# EAGLE board Panelized (EAGLE 9.2.2)
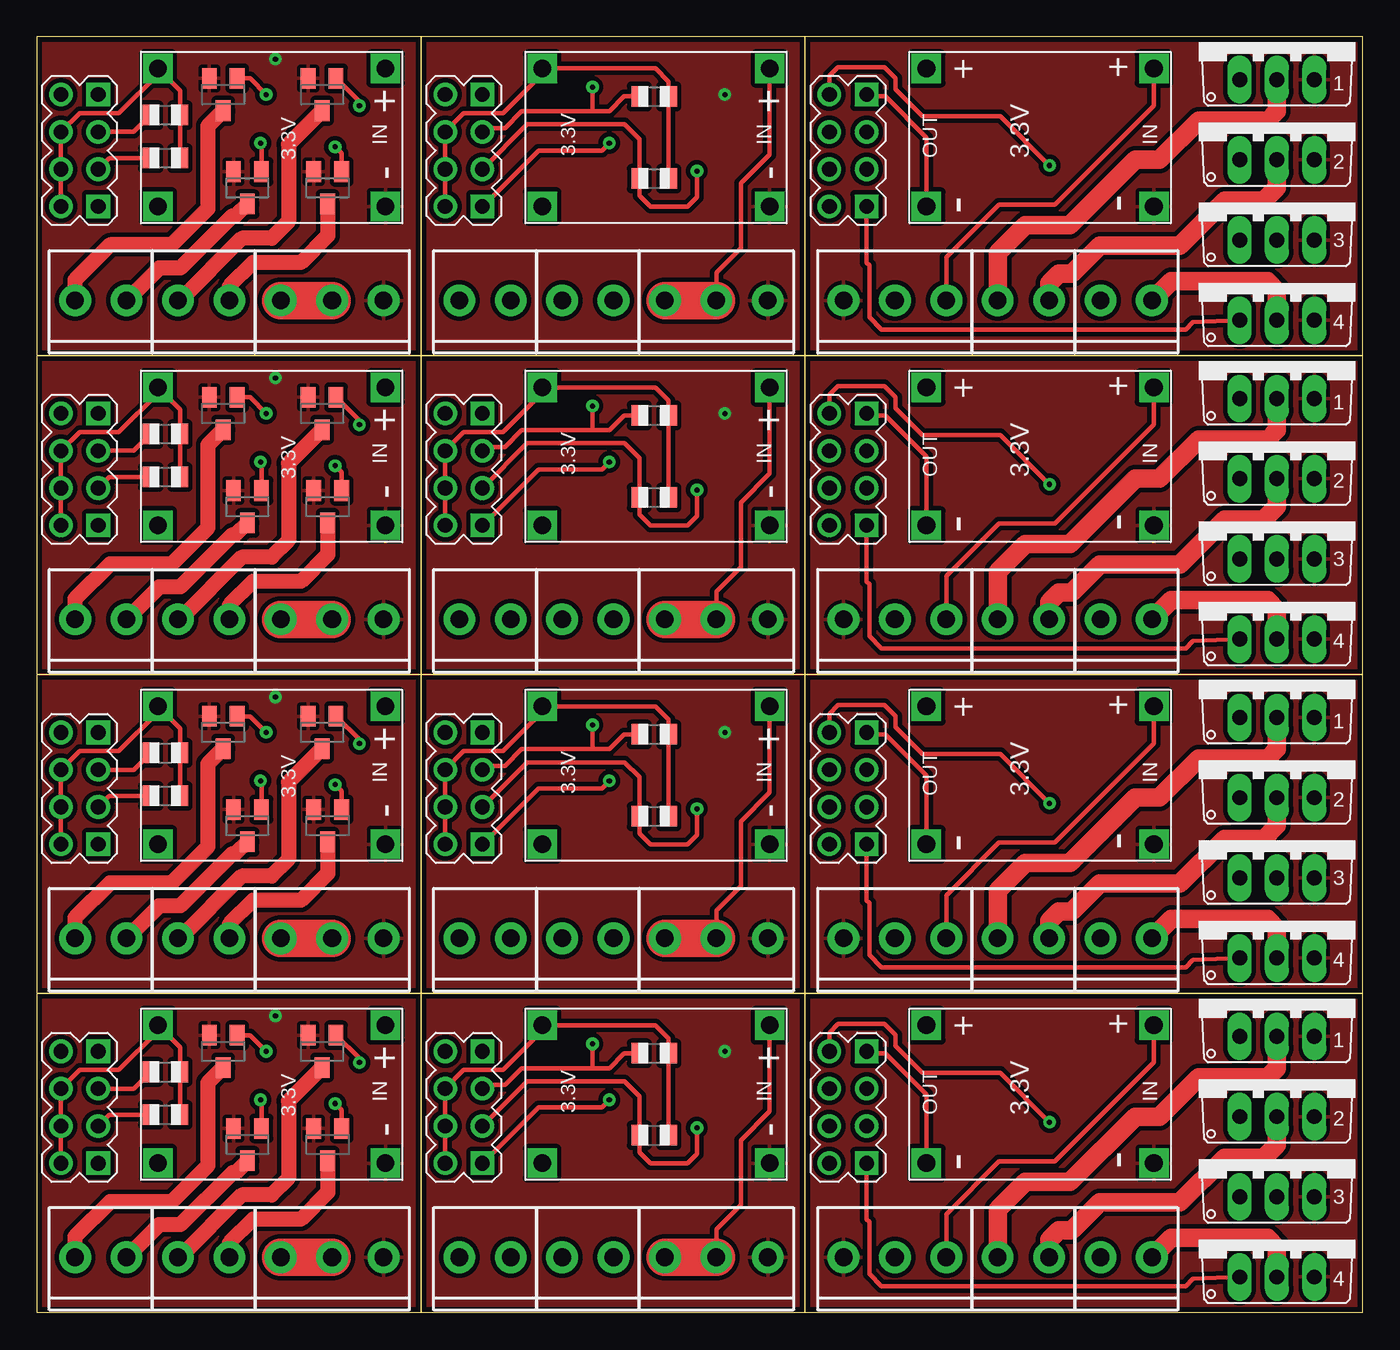
[diagram p0: board, top side]
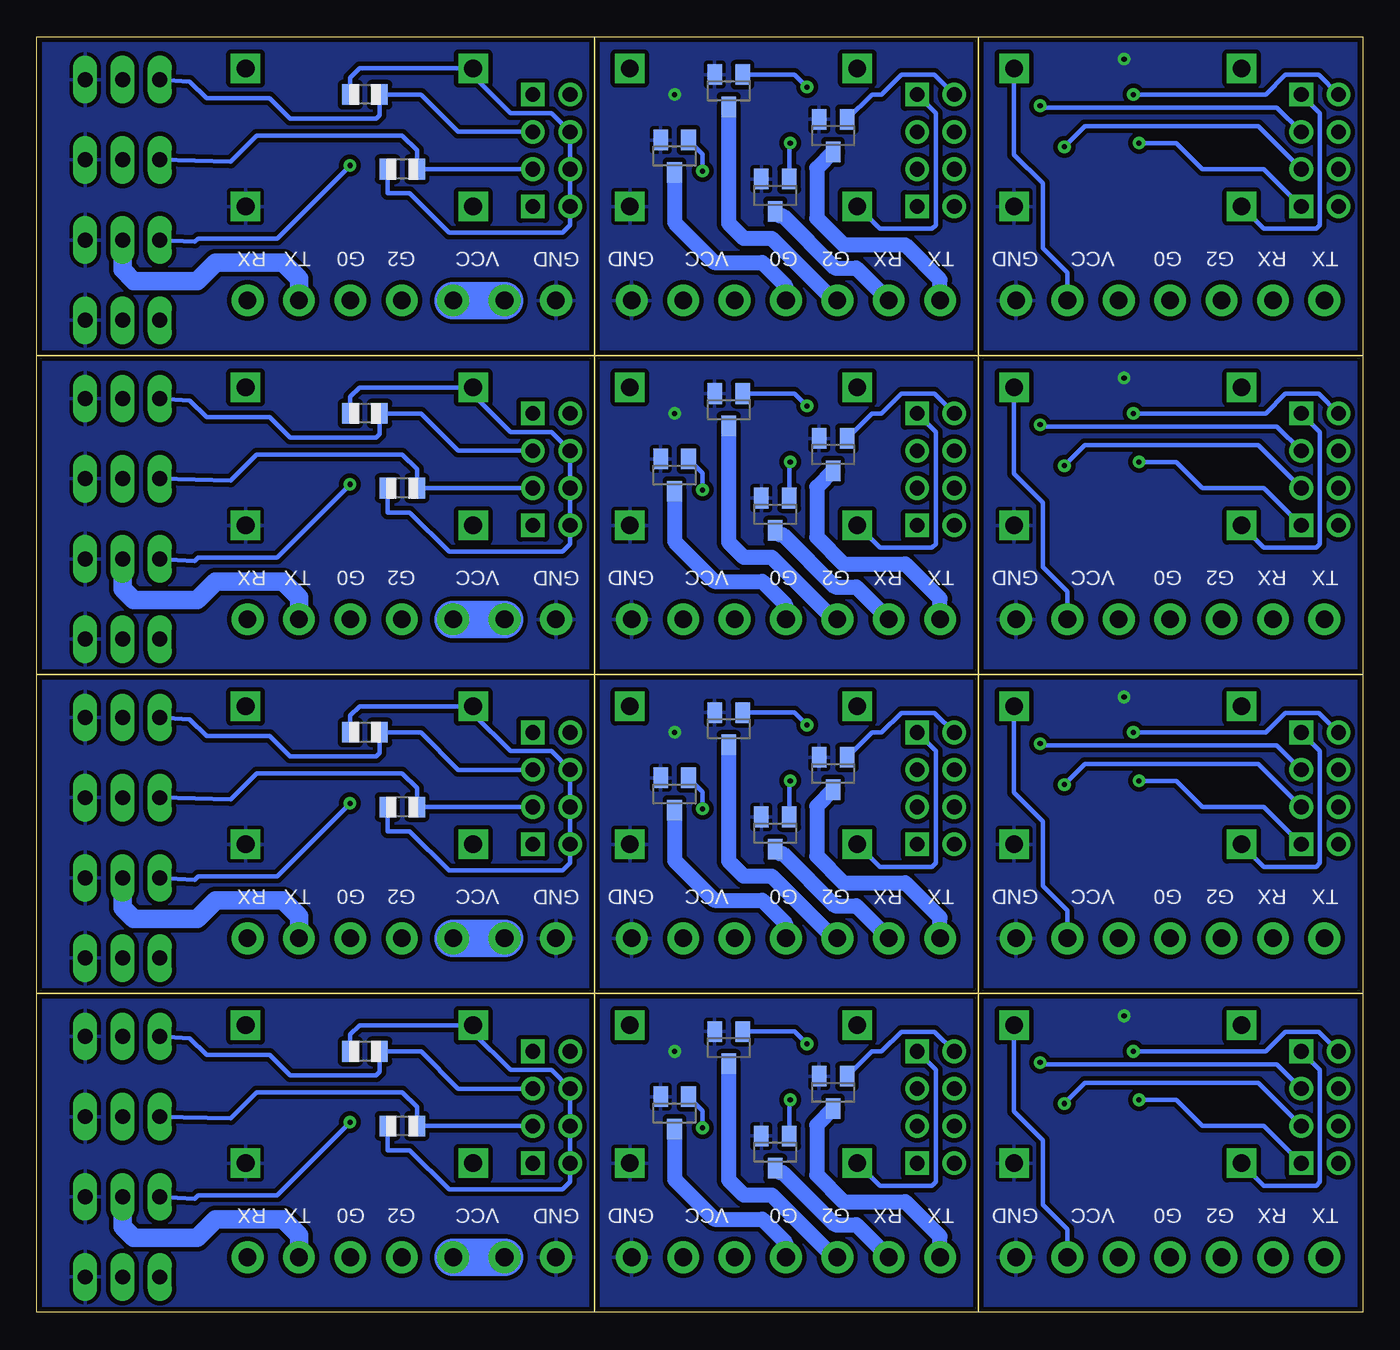
[diagram p1: board, bottom side, seen from below]

Size 90.3 x 86.87 mm. Coordinates in mm from the lower left corner, seen from the top.
Outline: 0,0 26.16,0.01 26.16,21.72 0,21.71 0,0
Outline: 26.16,0 52.32,0.01 52.32,21.72 26.16,21.71 26.16,0
Outline: 52.32,0 90.3,0.01 90.3,21.72 52.32,21.71 52.32,0
Outline: 0,21.72 26.16,21.72 26.16,43.44 0,43.43 0,21.72
Outline: 26.16,21.72 52.32,21.72 52.32,43.44 26.16,43.43 26.16,21.72
Outline: 52.32,21.72 90.3,21.72 90.3,43.44 52.32,43.43 52.32,21.72
Outline: 0,43.43 26.16,43.44 26.16,65.15 0,65.15 0,43.43
Outline: 26.16,43.43 52.32,43.44 52.32,65.15 26.16,65.15 26.16,43.43
Outline: 52.32,43.43 90.3,43.44 90.3,65.15 52.32,65.15 52.32,43.43
Outline: 0,65.15 26.16,65.16 26.16,86.87 0,86.86 0,65.15
Outline: 26.16,65.15 52.32,65.16 52.32,86.87 26.16,86.86 26.16,65.15
Outline: 52.32,65.15 90.3,65.16 90.3,86.87 52.32,86.86 52.32,65.15
Copper layers (1*16): Top 0.035mm / dielectric 1.5mm / Bottom 0.035mm
Design rules "default *": minimum track width 6mil, minimum drill 0.35mm, track to track 12mil, track to pad 12mil, pad to pad 12mil, via to via 12mil, smd to smd 12mil, copper to edge 14mil, drill to drill 6mil, minimum pad ring 12mil, minimum via ring 10mil, stop-mask expansion 4mil, vias tented up to drill 15mil, thermal gap 10mil

## Footprints (pad centres in the part's own frame; a part is rotated, then mirrored left to right if it is on the bottom)
SCREWTERMINAL-3.5MM-2 = drill 1.2 pad 2.159: 1 0,0; 2 3.5,0
SCREWTERMINAL-3.5MM-3 = drill 1.2 pad 2.159: 1 0,0; 2 3.5,0; 3 7,0
SOT23 = smd 1 x 1.4: 1 -0.95,-1.1; 2 0.95,-1.1; 3 0,1.1
TO220V = drill 1.016 long: 1 -2.54,-2.54; 2 0,-2.54; 3 2.54,-2.54
R0805 = smd 1.1 x 1.4: 1 -1,0; 2 1,0
DC-DC-STEP-DOWN-MP2307 = drill 1.2 pad 2 square: IN+ -7.747,-4.699; IN- -7.747,4.699; OUT+ 7.747,-4.699; OUT- 7.747,4.699
WIRELESS-WIFI-ESP-01 = drill 1 square: A1 -8.89,3.81; D1 -8.89,-3.81 | drill 1: A2 -11.43,3.81; B1 -8.89,1.27; B2 -11.43,1.27; C1 -8.89,-1.27; C2 -11.43,-1.27; D2 -11.43,-3.81

## Placement (x,y rotation side)
J1  [SCREWTERMINAL-3.5MM-2]  9.62,3.76 0 top
J2  [SCREWTERMINAL-3.5MM-2]  2.62,3.76 0 top
J3  [SCREWTERMINAL-3.5MM-3]  16.62,3.76 0 top
J4  [SCREWTERMINAL-3.5MM-2]  35.78,3.76 0 top
J5  [SCREWTERMINAL-3.5MM-2]  28.78,3.76 0 top
J6  [SCREWTERMINAL-3.5MM-3]  42.78,3.76 0 top
J7  [SCREWTERMINAL-3.5MM-2]  65.44,3.76 0 top
J8  [SCREWTERMINAL-3.5MM-2]  72.44,3.76 0 top
J9  [SCREWTERMINAL-3.5MM-3]  54.94,3.76 0 top
J10  [SCREWTERMINAL-3.5MM-2]  9.62,25.48 0 top
J11  [SCREWTERMINAL-3.5MM-2]  2.62,25.48 0 top
J12  [SCREWTERMINAL-3.5MM-3]  16.62,25.48 0 top
J13  [SCREWTERMINAL-3.5MM-2]  35.78,25.48 0 top
J14  [SCREWTERMINAL-3.5MM-2]  28.78,25.48 0 top
J15  [SCREWTERMINAL-3.5MM-3]  42.78,25.48 0 top
J16  [SCREWTERMINAL-3.5MM-2]  65.44,25.48 0 top
J17  [SCREWTERMINAL-3.5MM-2]  72.44,25.48 0 top
J18  [SCREWTERMINAL-3.5MM-3]  54.94,25.48 0 top
J19  [SCREWTERMINAL-3.5MM-2]  9.62,47.19 0 top
J20  [SCREWTERMINAL-3.5MM-2]  2.62,47.19 0 top
J21  [SCREWTERMINAL-3.5MM-3]  16.62,47.19 0 top
J22  [SCREWTERMINAL-3.5MM-2]  35.78,47.19 0 top
J23  [SCREWTERMINAL-3.5MM-2]  28.78,47.19 0 top
J24  [SCREWTERMINAL-3.5MM-3]  42.78,47.19 0 top
J25  [SCREWTERMINAL-3.5MM-2]  65.44,47.19 0 top
J26  [SCREWTERMINAL-3.5MM-2]  72.44,47.19 0 top
J27  [SCREWTERMINAL-3.5MM-3]  54.94,47.19 0 top
J28  [SCREWTERMINAL-3.5MM-2]  9.62,68.91 0 top
J29  [SCREWTERMINAL-3.5MM-2]  2.62,68.91 0 top
J30  [SCREWTERMINAL-3.5MM-3]  16.62,68.91 0 top
J31  [SCREWTERMINAL-3.5MM-2]  35.78,68.91 0 top
J32  [SCREWTERMINAL-3.5MM-2]  28.78,68.91 0 top
J33  [SCREWTERMINAL-3.5MM-3]  42.78,68.91 0 top
J34  [SCREWTERMINAL-3.5MM-2]  65.44,68.91 0 top
J35  [SCREWTERMINAL-3.5MM-2]  72.44,68.91 0 top
J36  [SCREWTERMINAL-3.5MM-3]  54.94,68.91 0 top
Q1  [SOT23]  12.7,17.78 180 top
Q2  [SOT23]  14.35,11.43 180 top
Q3  [SOT23]  19.81,11.43 180 top
Q4  [SOT23]  19.43,17.78 180 top
Q5  [SOT23]  36.07,14.99 180 bottom
Q6  [SOT23]  40.01,10.92 180 bottom
Q7  [SOT23]  46.86,13.59 180 bottom
Q8  [SOT23]  43.18,18.03 180 bottom
Q9  [TO220V]  84.45,10.41 0 top
Q10  [TO220V]  84.45,4.95 0 top
Q11  [TO220V]  84.45,15.88 0 top
Q12  [TO220V]  84.45,21.34 0 top
Q13  [SOT23]  12.7,39.5 180 top
Q14  [SOT23]  14.35,33.15 180 top
Q15  [SOT23]  19.81,33.15 180 top
Q16  [SOT23]  19.43,39.5 180 top
Q17  [SOT23]  36.07,36.7 180 bottom
Q18  [SOT23]  40.01,32.64 180 bottom
Q19  [SOT23]  46.86,35.31 180 bottom
Q20  [SOT23]  43.18,39.75 180 bottom
Q21  [TO220V]  84.45,32.13 0 top
Q22  [TO220V]  84.45,26.67 0 top
Q23  [TO220V]  84.45,37.59 0 top
Q24  [TO220V]  84.45,43.05 0 top
Q25  [SOT23]  12.7,61.21 180 top
Q26  [SOT23]  14.35,54.86 180 top
Q27  [SOT23]  19.81,54.86 180 top
Q28  [SOT23]  19.43,61.21 180 top
Q29  [SOT23]  36.07,58.42 180 bottom
Q30  [SOT23]  40.01,54.36 180 bottom
Q31  [SOT23]  46.86,57.02 180 bottom
Q32  [SOT23]  43.18,61.47 180 bottom
Q33  [TO220V]  84.45,53.85 0 top
Q34  [TO220V]  84.45,48.39 0 top
Q35  [TO220V]  84.45,59.31 0 top
Q36  [TO220V]  84.45,64.77 0 top
Q37  [SOT23]  12.7,82.93 180 top
Q38  [SOT23]  14.35,76.58 180 top
Q39  [SOT23]  19.81,76.58 180 top
Q40  [SOT23]  19.43,82.93 180 top
Q41  [SOT23]  36.07,80.14 180 bottom
Q42  [SOT23]  40.01,76.07 180 bottom
Q43  [SOT23]  46.86,78.74 180 bottom
Q44  [SOT23]  43.18,83.19 180 bottom
Q45  [TO220V]  84.45,75.56 0 top
Q46  [TO220V]  84.45,70.1 0 top
Q47  [TO220V]  84.45,81.03 0 top
Q48  [TO220V]  84.45,86.49 0 top
R1  [R0805]  8.76,13.46 0 top
R2  [R0805]  8.76,16.38 0 top
R3  [R0805]  42.04,12.06 0 top
R4  [R0805]  42.04,17.65 0 top
R5  [R0805]  65.41,12.7 180 bottom
R6  [R0805]  67.94,17.78 180 bottom
R7  [R0805]  8.76,35.18 0 top
R8  [R0805]  8.76,38.1 0 top
R9  [R0805]  42.04,33.78 0 top
R10  [R0805]  42.04,39.37 0 top
R11  [R0805]  65.41,34.42 180 bottom
R12  [R0805]  67.94,39.5 180 bottom
R13  [R0805]  8.76,56.9 0 top
R14  [R0805]  8.76,59.82 0 top
R15  [R0805]  42.04,55.5 0 top
R16  [R0805]  42.04,61.09 0 top
R17  [R0805]  65.41,56.13 180 bottom
R18  [R0805]  67.94,61.21 180 bottom
R19  [R0805]  8.76,78.61 0 top
R20  [R0805]  8.76,81.53 0 top
R21  [R0805]  42.04,77.22 0 top
R22  [R0805]  42.04,82.8 0 top
R23  [R0805]  65.41,77.85 180 bottom
R24  [R0805]  67.94,82.93 180 bottom
U$1  DC-DC-STEP-DOWN-MP2307  [DC-DC-STEP-DOWN-MP2307]  16,14.86 180 top
U$2  WIRELESS-WIFI-ESP-01  [WIRELESS-WIFI-ESP-01]  13.08,13.97 0 top
U$3  DC-DC-STEP-DOWN-MP2307  [DC-DC-STEP-DOWN-MP2307]  42.16,14.86 180 top
U$4  WIRELESS-WIFI-ESP-01  [WIRELESS-WIFI-ESP-01]  39.24,13.97 0 top
U$5  DC-DC-STEP-DOWN-MP2307  [DC-DC-STEP-DOWN-MP2307]  68.33,14.86 180 top
U$6  WIRELESS-WIFI-ESP-01  [WIRELESS-WIFI-ESP-01]  65.41,13.97 0 top
U$7  DC-DC-STEP-DOWN-MP2307  [DC-DC-STEP-DOWN-MP2307]  16,36.58 180 top
U$8  WIRELESS-WIFI-ESP-01  [WIRELESS-WIFI-ESP-01]  13.08,35.69 0 top
U$9  DC-DC-STEP-DOWN-MP2307  [DC-DC-STEP-DOWN-MP2307]  42.16,36.58 180 top
U$10  WIRELESS-WIFI-ESP-01  [WIRELESS-WIFI-ESP-01]  39.24,35.69 0 top
U$11  DC-DC-STEP-DOWN-MP2307  [DC-DC-STEP-DOWN-MP2307]  68.33,36.58 180 top
U$12  WIRELESS-WIFI-ESP-01  [WIRELESS-WIFI-ESP-01]  65.41,35.69 0 top
U$13  DC-DC-STEP-DOWN-MP2307  [DC-DC-STEP-DOWN-MP2307]  16,58.29 180 top
U$14  WIRELESS-WIFI-ESP-01  [WIRELESS-WIFI-ESP-01]  13.08,57.4 0 top
U$15  DC-DC-STEP-DOWN-MP2307  [DC-DC-STEP-DOWN-MP2307]  42.16,58.29 180 top
U$16  WIRELESS-WIFI-ESP-01  [WIRELESS-WIFI-ESP-01]  39.24,57.4 0 top
U$17  DC-DC-STEP-DOWN-MP2307  [DC-DC-STEP-DOWN-MP2307]  68.33,58.29 180 top
U$18  WIRELESS-WIFI-ESP-01  [WIRELESS-WIFI-ESP-01]  65.41,57.4 0 top
U$19  DC-DC-STEP-DOWN-MP2307  [DC-DC-STEP-DOWN-MP2307]  16,80.01 180 top
U$20  WIRELESS-WIFI-ESP-01  [WIRELESS-WIFI-ESP-01]  13.08,79.12 0 top
U$21  DC-DC-STEP-DOWN-MP2307  [DC-DC-STEP-DOWN-MP2307]  42.16,80.01 180 top
U$22  WIRELESS-WIFI-ESP-01  [WIRELESS-WIFI-ESP-01]  39.24,79.12 0 top
U$23  DC-DC-STEP-DOWN-MP2307  [DC-DC-STEP-DOWN-MP2307]  68.33,80.01 180 top
U$24  WIRELESS-WIFI-ESP-01  [WIRELESS-WIFI-ESP-01]  65.41,79.12 0 top

## Library data of the parts
J1 J2 J4 J5 J7 J8 J10 J11 J13 J14 J16 J17 J19 J20 J22 J23 J25 J26 J28 J29 J31 J32 J34 J35 = custom; PROD_ID: CONN-08399
J3 J6 J9 J12 J15 J18 J21 J24 J27 J30 J33 J36 = custom; PROD_ID: CONN-08288; SF_ID: PRT-08235
Q1-Q48 R1-R24 = adafruit
U$1 U$3 U$5 U$7 U$9 U$11 U$13 U$15 U$17 U$19 U$21 U$23 = custom; OC_FARNELL: unknown
U$2 U$4 U$6 U$8 U$10 U$12 U$14 U$16 U$18 U$20 U$22 U$24 = custom; OC_FARNELL: unknown; SPICEPREFIX: X

## Nets
GND: J3.3 Q1.2 Q2.2 Q3.2 Q4.2 U$1.IN-
GND1: J6.3 Q5.2 Q6.2 Q7.2 Q8.2 U$3.IN-
GND2: J9.1 Q9.3 Q10.3 Q11.3 Q12.3 U$5.IN-
GND3: J12.3 Q13.2 Q14.2 Q15.2 Q16.2 U$7.IN-
GND4: J15.3 Q17.2 Q18.2 Q19.2 Q20.2 U$9.IN-
GND5: J18.1 Q21.3 Q22.3 Q23.3 Q24.3 U$11.IN-
GND6: J21.3 Q25.2 Q26.2 Q27.2 Q28.2 U$13.IN-
GND7: J24.3 Q29.2 Q30.2 Q31.2 Q32.2 U$15.IN-
GND8: J27.1 Q33.3 Q34.3 Q35.3 Q36.3 U$17.IN-
GND9: J30.3 Q37.2 Q38.2 Q39.2 Q40.2 U$19.IN-
GND10: J33.3 Q41.2 Q42.2 Q43.2 Q44.2 U$21.IN-
GND11: J36.1 Q45.3 Q46.3 Q47.3 Q48.3 U$23.IN-
N$1: R1.2 R2.2 U$1.OUT+ U$2.B2 U$2.C2 U$2.D2
N$2: Q2.1 U$2.D1
N$3: U$1.OUT- U$2.A1
N$4: Q3.1 R1.1 U$2.C1
N$5: Q4.1 R2.1 U$2.B1
N$6: Q1.1 U$2.A2
N$7: J3.1 J3.2 U$1.IN+
N$8: J2.2 Q2.3
N$9: J2.1 Q1.3
N$10: J1.1 Q4.3
N$11: J1.2 Q3.3
N$12: R3.2 R4.2 U$3.OUT+ U$4.B2 U$4.C2 U$4.D2
N$13: U$3.OUT- U$4.A1
N$14: Q7.1 R3.1 U$4.C1
N$15: Q8.1 R4.1 U$4.B1
N$16: Q6.1 U$4.D1
N$17: Q5.1 U$4.A2
N$18: J5.2 Q6.3
N$19: J5.1 Q5.3
N$20: J4.1 Q8.3
N$21: J4.2 Q7.3
N$22: J6.1 J6.2 U$3.IN+
N$23: R5.2 R6.2 U$5.OUT+ U$6.B2 U$6.C2 U$6.D2
N$24: U$5.OUT- U$6.A1
N$25: Q11.1 R5.1 U$6.C1
N$26: Q12.1 R6.1 U$6.B1
N$27: Q10.1 U$6.D1
N$28: J7.1 Q12.2
N$29: J7.2 Q11.2
N$30: J9.2 J9.3 U$5.IN+
N$31: Q9.1 U$6.A2
N$32: J8.1 Q9.2
N$33: J8.2 Q10.2
N$34: R7.2 R8.2 U$7.OUT+ U$8.B2 U$8.C2 U$8.D2
N$35: U$7.OUT- U$8.A1
N$36: Q15.1 R7.1 U$8.C1
N$37: Q16.1 R8.1 U$8.B1
N$38: Q14.1 U$8.D1
N$39: Q13.1 U$8.A2
N$40: J11.2 Q14.3
N$41: J11.1 Q13.3
N$42: J10.1 Q16.3
N$43: J10.2 Q15.3
N$44: J12.1 J12.2 U$7.IN+
N$45: R9.2 R10.2 U$9.OUT+ U$10.B2 U$10.C2 U$10.D2
N$46: U$9.OUT- U$10.A1
N$47: Q19.1 R9.1 U$10.C1
N$48: Q20.1 R10.1 U$10.B1
N$49: Q18.1 U$10.D1
N$50: Q17.1 U$10.A2
N$51: J14.2 Q18.3
N$52: J14.1 Q17.3
N$53: J13.1 Q20.3
N$54: J13.2 Q19.3
N$55: J15.1 J15.2 U$9.IN+
N$56: R11.2 R12.2 U$11.OUT+ U$12.B2 U$12.C2 U$12.D2
N$57: U$11.OUT- U$12.A1
N$58: Q23.1 R11.1 U$12.C1
N$59: Q24.1 R12.1 U$12.B1
N$60: Q22.1 U$12.D1
N$61: J16.1 Q24.2
N$62: J16.2 Q23.2
N$63: J18.2 J18.3 U$11.IN+
N$64: Q21.1 U$12.A2
N$65: J17.1 Q21.2
N$66: J17.2 Q22.2
N$67: R13.2 R14.2 U$13.OUT+ U$14.B2 U$14.C2 U$14.D2
N$68: U$13.OUT- U$14.A1
N$69: Q27.1 R13.1 U$14.C1
N$70: Q28.1 R14.1 U$14.B1
N$71: Q26.1 U$14.D1
N$72: Q25.1 U$14.A2
N$73: J20.2 Q26.3
N$74: J20.1 Q25.3
N$75: J19.1 Q28.3
N$76: J19.2 Q27.3
N$77: J21.1 J21.2 U$13.IN+
N$78: R15.2 R16.2 U$15.OUT+ U$16.B2 U$16.C2 U$16.D2
N$79: U$15.OUT- U$16.A1
N$80: Q31.1 R15.1 U$16.C1
N$81: Q32.1 R16.1 U$16.B1
N$82: Q30.1 U$16.D1
N$83: Q29.1 U$16.A2
N$84: J23.2 Q30.3
N$85: J23.1 Q29.3
N$86: J22.1 Q32.3
N$87: J22.2 Q31.3
N$88: J24.1 J24.2 U$15.IN+
N$89: R17.2 R18.2 U$17.OUT+ U$18.B2 U$18.C2 U$18.D2
N$90: U$17.OUT- U$18.A1
N$91: Q35.1 R17.1 U$18.C1
N$92: Q36.1 R18.1 U$18.B1
N$93: Q34.1 U$18.D1
N$94: J25.1 Q36.2
N$95: J25.2 Q35.2
N$96: J27.2 J27.3 U$17.IN+
N$97: Q33.1 U$18.A2
N$98: J26.1 Q33.2
N$99: J26.2 Q34.2
N$100: R19.2 R20.2 U$19.OUT+ U$20.B2 U$20.C2 U$20.D2
N$101: U$19.OUT- U$20.A1
N$102: Q39.1 R19.1 U$20.C1
N$103: Q40.1 R20.1 U$20.B1
N$104: Q38.1 U$20.D1
N$105: Q37.1 U$20.A2
N$106: J29.2 Q38.3
N$107: J29.1 Q37.3
N$108: J28.1 Q40.3
N$109: J28.2 Q39.3
N$110: J30.1 J30.2 U$19.IN+
N$111: R21.2 R22.2 U$21.OUT+ U$22.B2 U$22.C2 U$22.D2
N$112: U$21.OUT- U$22.A1
N$113: Q43.1 R21.1 U$22.C1
N$114: Q44.1 R22.1 U$22.B1
N$115: Q42.1 U$22.D1
N$116: Q41.1 U$22.A2
N$117: J32.2 Q42.3
N$118: J32.1 Q41.3
N$119: J31.1 Q44.3
N$120: J31.2 Q43.3
N$121: J33.1 J33.2 U$21.IN+
N$122: R23.2 R24.2 U$23.OUT+ U$24.B2 U$24.C2 U$24.D2
N$123: U$23.OUT- U$24.A1
N$124: Q47.1 R23.1 U$24.C1
N$125: Q48.1 R24.1 U$24.B1
N$126: Q46.1 U$24.D1
N$127: J34.1 Q48.2
N$128: J34.2 Q47.2
N$129: J36.2 J36.3 U$23.IN+
N$130: Q45.1 U$24.A2
N$131: J35.1 Q45.2
N$132: J35.2 Q46.2

## Tracks (layer width: path | path; a pad name or v marks a point on that pad's centre or on a via)
GND  (via drill 0.35)
  other vias: 16.26,20.19
  pour Top: 0,21.72 0,0 26.16,0 26.16,21.72
  pour Bottom: 0,21.72 0,0 26.16,0 26.16,21.72
GND1  (via drill 0.35)
  other vias: 46.86,17.78
  pour Bottom: 26.16,21.72 26.16,0 52.32,0 52.32,21.72
  pour Top: 26.16,21.72 26.16,0 52.32,0 52.32,21.72
GND2
  pour Top: 52.32,21.72 52.32,0 90.3,0 90.3,21.72
  pour Bottom: 52.32,21.72 52.32,0 90.3,0 90.3,21.72
GND3  (via drill 0.35)
  other vias: 16.26,41.91
  pour Top: 0,43.43 0,21.72 26.16,21.72 26.16,43.43
  pour Bottom: 0,43.43 0,21.72 26.16,21.72 26.16,43.43
GND4  (via drill 0.35)
  other vias: 46.86,39.5
  pour Bottom: 26.16,43.43 26.16,21.72 52.32,21.72 52.32,43.43
  pour Top: 26.16,43.43 26.16,21.72 52.32,21.72 52.32,43.43
GND5
  pour Top: 52.32,43.43 52.32,21.72 90.3,21.72 90.3,43.43
  pour Bottom: 52.32,43.43 52.32,21.72 90.3,21.72 90.3,43.43
GND6  (via drill 0.35)
  other vias: 16.26,63.63
  pour Top: 0,65.15 0,43.43 26.16,43.43 26.16,65.15
  pour Bottom: 0,65.15 0,43.43 26.16,43.43 26.16,65.15
GND7  (via drill 0.35)
  other vias: 46.86,61.21
  pour Bottom: 26.16,65.15 26.16,43.43 52.32,43.43 52.32,65.15
  pour Top: 26.16,65.15 26.16,43.43 52.32,43.43 52.32,65.15
GND8
  pour Top: 52.32,65.15 52.32,43.43 90.3,43.43 90.3,65.15
  pour Bottom: 52.32,65.15 52.32,43.43 90.3,43.43 90.3,65.15
GND9  (via drill 0.35)
  other vias: 16.26,85.34
  pour Top: 0,86.87 0,65.15 26.16,65.15 26.16,86.87
  pour Bottom: 0,86.87 0,65.15 26.16,65.15 26.16,86.87
GND10  (via drill 0.35)
  other vias: 46.86,82.93
  pour Bottom: 26.16,86.87 26.16,65.15 52.32,65.15 52.32,86.87
  pour Top: 26.16,86.87 26.16,65.15 52.32,65.15 52.32,86.87
GND11
  pour Top: 52.32,86.87 52.32,65.15 90.3,65.15 90.3,86.87
  pour Bottom: 52.32,86.87 52.32,65.15 90.3,65.15 90.3,86.87
N$1
  Top 0.305: U$2.D2 U$2.C2 U$2.B2 2.92,16.51 5.59,16.51 8.26,19.18 U$1.OUT+ 9.76,18.05 R2.2 R1.2
N$2  (via drill 0.35)
  Top 0.305: Q2.1 15.3,14.42 v15.24,14.48
  Bottom 0.305: U$2.D1 6.73,12.7 10.92,12.7 12.7,14.48 v15.24,14.48
N$3
  Bottom 0.305: U$2.A1 2.92,16.51 2.92,8.89 3.17,8.64 6.73,8.64 U$1.OUT-
N$4  (via drill 0.35)
  Top 0.305: R1.1 4.95,13.46 U$2.C1 | Q3.1 20.76,13.78 v20.32,14.22
  Bottom 0.305: v20.32,14.22 18.92,15.62 7.11,15.62 U$2.C1
N$5  (via drill 0.35)
  Top 0.305: R2.1 6.62,15.24 U$2.B1 | Q4.1 21.97,17.29 v21.97,17.02
  Bottom 0.305: U$2.B1 5.84,16.89 21.84,16.89 v21.97,17.02
N$6  (via drill 0.35)
  Top 0.305: v15.62,17.78 14.52,18.88 Q1.1
  Bottom 0.305: v15.62,17.78 6.6,17.78 5.26,19.12 2.99,19.12 U$2.A2
N$7
  Top 2.54: J3.1 J3.2
  Bottom 0.305: J3.2 20.12,5.65 21.78,7.32 21.78,11.73 23.75,13.7 U$1.IN+
N$8
  Top 1.016: Q2.3 13.55,9.53 13.34,9.53 9.78,5.97 8.33,5.97 J2.2
N$9
  Top 1.016: Q1.3 11.66,15.64 11.66,9.99 9.21,7.54 4.99,7.54 2.62,5.17 J2.1
N$10
  Top 0.61: J1.1 9.72,3.76
  Top 1.016: Q4.3 17.14,14.39 17.14,9.14 16,8 13.96,8 9.72,3.76
N$11
  Top 1.016: Q3.3 19.81,8.17 17.99,6.35 14.73,6.35 13.12,4.73 J1.2
N$12
  Top 0.305: U$4.D2 U$4.C2 U$4.B2 29.08,16.51 31.75,16.51 34.42,19.18 U$3.OUT+ 42.15,19.56 43.04,18.67 R4.2 R3.2
N$13
  Bottom 0.305: U$4.A1 29.08,16.51 29.08,8.89 29.34,8.64 32.89,8.64 U$3.OUT-
N$14  (via drill 0.35)
  Top 0.305: U$4.C1 33.4,15.75 40.02,15.75 41.04,14.73 R3.1 41.04,10.91 41.78,10.16 44.32,10.16 44.96,10.79 v44.96,12.57
  Bottom 0.305: 45.98,14.73 Q7.1 44.96,13.73 v44.96,12.57
N$15  (via drill 0.35)
  Top 0.305: U$4.B1 30.61,15.49 31.88,15.49 33.02,16.64 37.85,16.64 | 37.85,16.64 38.99,16.64 40.01,17.65 R4.1 | v37.85,18.29 37.85,16.64
  Bottom 0.305: v37.85,18.29 38.69,19.13 Q8.1
N$16  (via drill 0.35)
  Top 0.305: U$4.D1 34.16,13.97 38.48,13.97 v38.99,14.48
  Bottom 0.305: v38.99,14.48 39.05,14.41 Q6.1
N$17
  Bottom 0.305: Q5.1 33.42,17.78 32.76,17.78 31.42,19.12 29.16,19.12 U$4.A2
N$18
  Bottom 0.61: 39.71,9.53 39.5,9.53
  Bottom 1.016: Q6.3 39.71,9.53 | 39.5,9.53 35.94,5.97 34.49,5.97 J5.2
N$19
  Bottom 1.016: Q5.3 37.18,12.77 37.18,9.36 35.37,7.54 31.15,7.54 28.78,5.17 J5.1
N$20
  Bottom 1.016: Q8.3 43.18,9.02 42.16,8 40.25,8 36.01,3.76 J4.1
N$21
  Bottom 1.016: Q7.3 46.86,9.06 44.15,6.35 40.89,6.35 39.28,4.73 J4.2
N$22
  Top 0.305: J6.2 46.28,5.65 47.95,7.32 47.95,11.73 49.91,13.7 U$3.IN+
  Top 2.54: J6.1 J6.2
N$23
  Bottom 0.254: R6.2 69.07,17.65
  Bottom 0.305: R6.2 68.94,18.94 68.33,19.56 U$5.OUT+ 60.58,19.05 58.04,16.51 55.24,16.51 U$6.B2 U$6.C2 U$6.D2 53.98,8.89 54.48,8.38 62.23,8.38 64.9,11.05 66.41,11.05 R5.2
N$24
  Top 0.305: U$6.A1 56.64,17.65 57.78,17.65 60.58,14.86 U$5.OUT-
N$25
  Bottom 0.305: U$6.C1 R5.1 64.41,13.99 65.41,14.99 75.31,14.99 77.09,13.21 Q11.1
N$26
  Bottom 0.305: U$6.B1 61.59,15.24 64.14,17.78 R6.1 66.94,16.37 67.18,16.13 73.03,16.13 74.42,17.53 78.74,17.53 79.88,18.67 Q12.1
N$27
  Top 0.305: U$6.D1 56.52,6.35 56.69,6.17 56.69,2.62 57.53,1.78 78.23,1.78 78.74,2.29 Q10.1
N$28
  Top 1.27: Q12.2 84.45,16.64 83.82,16 79.12,16 76.45,13.34 74.8,13.34 70.36,8.89 67.31,8.89 65.44,7.02 J7.1
N$29
  Top 1.27: Q11.2 84.45,11.43 83.57,10.54 80.9,10.54 77.85,7.49 72.39,7.49 70.48,5.59 69.6,5.59 68.94,4.93 J7.2
N$30
  Top 0.305: J9.3 61.94,6.7 65.53,10.29 69.34,10.29 76.07,17.02 U$5.IN+
  Bottom 2.54: J9.2 J9.3
N$31  (via drill 0.35)
  Top 0.305: U$6.A2 53.98,19.05 54.56,19.63 57.73,19.63 58.47,18.9 58.47,18.16 60.33,16.31 65.61,16.31 v68.96,12.95
  Bottom 0.305: v68.96,12.95 73.94,7.98 79.3,7.98 79.53,7.75 Q9.1
N$32
  Bottom 1.27: Q9.2 84.45,5.84 83.69,5.08 79.38,5.08 78.11,6.35 73.53,6.35 72.44,5.26 J8.1
N$33
  Top 1.27: Q10.2 84.45,4.45 83.82,5.08 77.26,5.08 J8.2
N$34
  Top 0.305: U$8.D2 U$8.C2 U$8.B2 2.92,38.23 5.59,38.23 8.26,40.89 U$7.OUT+ 9.76,39.77 R8.2 R7.2
N$35
  Bottom 0.305: U$8.A1 2.92,38.23 2.92,30.61 3.17,30.35 6.73,30.35 U$7.OUT-
N$36  (via drill 0.35)
  Top 0.305: R7.1 4.95,35.18 U$8.C1 | Q15.1 20.76,35.5 v20.32,35.94
  Bottom 0.305: v20.32,35.94 18.92,37.34 7.11,37.34 U$8.C1
N$37  (via drill 0.35)
  Top 0.305: R8.1 6.62,36.96 U$8.B1 | Q16.1 21.97,39.01 v21.97,38.73
  Bottom 0.305: U$8.B1 5.84,38.61 21.84,38.61 v21.97,38.73
N$38  (via drill 0.35)
  Top 0.305: Q14.1 15.3,36.13 v15.24,36.2
  Bottom 0.305: U$8.D1 6.73,34.42 10.92,34.42 12.7,36.2 v15.24,36.2
N$39  (via drill 0.35)
  Top 0.305: v15.62,39.5 14.52,40.6 Q13.1
  Bottom 0.305: v15.62,39.5 6.6,39.5 5.26,40.84 2.99,40.84 U$8.A2
N$40
  Top 1.016: Q14.3 13.55,31.24 13.34,31.24 9.78,27.69 8.33,27.69 J11.2
N$41
  Top 1.016: Q13.3 11.66,37.35 11.66,31.71 9.21,29.26 4.99,29.26 2.62,26.89 J11.1
N$42
  Top 0.61: J10.1 9.72,25.48
  Top 1.016: Q16.3 17.14,36.11 17.14,30.86 16,29.72 13.96,29.72 9.72,25.48
N$43
  Top 1.016: Q15.3 19.81,29.89 17.99,28.07 14.73,28.07 13.12,26.45 J10.2
N$44
  Top 2.54: J12.1 J12.2
  Bottom 0.305: J12.2 20.12,27.37 21.78,29.04 21.78,33.45 23.75,35.41 U$7.IN+
N$45
  Top 0.305: U$10.D2 U$10.C2 U$10.B2 29.08,38.23 31.75,38.23 34.42,40.89 U$9.OUT+ 42.15,41.27 43.04,40.39 R10.2 R9.2
N$46
  Bottom 0.305: U$10.A1 29.08,38.23 29.08,30.61 29.34,30.35 32.89,30.35 U$9.OUT-
N$47  (via drill 0.35)
  Top 0.305: U$10.C1 33.4,37.47 40.02,37.47 41.04,36.45 R9.1 41.04,32.62 41.78,31.88 44.32,31.88 44.96,32.51 v44.96,34.29
  Bottom 0.305: 45.98,36.45 Q19.1 44.96,35.45 v44.96,34.29
N$48  (via drill 0.35)
  Top 0.305: U$10.B1 30.61,37.21 31.88,37.21 33.02,38.35 37.85,38.35 | 37.85,38.35 38.99,38.35 40.01,39.37 R10.1 | v37.85,40.01 37.85,38.35
  Bottom 0.305: v37.85,40.01 38.69,40.85 Q20.1
N$49  (via drill 0.35)
  Top 0.305: U$10.D1 34.16,35.69 38.48,35.69 v38.99,36.2
  Bottom 0.305: v38.99,36.2 39.05,36.13 Q18.1
N$50
  Bottom 0.305: Q17.1 33.42,39.5 32.76,39.5 31.42,40.84 29.16,40.84 U$10.A2
N$51
  Bottom 0.61: 39.71,31.24 39.5,31.24
  Bottom 1.016: Q18.3 39.71,31.24 | 39.5,31.24 35.94,27.69 34.49,27.69 J14.2
N$52
  Bottom 1.016: Q17.3 37.18,34.49 37.18,31.07 35.37,29.26 31.15,29.26 28.78,26.89 J14.1
N$53
  Bottom 1.016: Q20.3 43.18,30.73 42.16,29.72 40.25,29.72 36.01,25.48 J13.1
N$54
  Bottom 1.016: Q19.3 46.86,30.78 44.15,28.07 40.89,28.07 39.28,26.45 J13.2
N$55
  Top 0.305: J15.2 46.28,27.37 47.95,29.04 47.95,33.45 49.91,35.41 U$9.IN+
  Top 2.54: J15.1 J15.2
N$56
  Bottom 0.254: R12.2 69.07,39.37
  Bottom 0.305: R12.2 68.94,40.66 68.33,41.27 U$11.OUT+ 60.58,40.77 58.04,38.23 55.24,38.23 U$12.B2 U$12.C2 U$12.D2 53.98,30.61 54.48,30.1 62.23,30.1 64.9,32.77 66.41,32.77 R11.2
N$57
  Top 0.305: U$12.A1 56.64,39.37 57.78,39.37 60.58,36.58 U$11.OUT-
N$58
  Bottom 0.305: U$12.C1 R11.1 64.41,35.7 65.41,36.7 75.31,36.7 77.09,34.92 Q23.1
N$59
  Bottom 0.305: U$12.B1 61.59,36.96 64.14,39.5 R12.1 66.94,38.08 67.18,37.85 73.03,37.85 74.42,39.24 78.74,39.24 79.88,40.39 Q24.1
N$60
  Top 0.305: U$12.D1 56.52,28.07 56.69,27.89 56.69,24.33 57.53,23.5 78.23,23.5 78.74,24 Q22.1
N$61
  Top 1.27: Q24.2 84.45,38.35 83.82,37.72 79.12,37.72 76.45,35.05 74.8,35.05 70.36,30.61 67.31,30.61 65.44,28.74 J16.1
N$62
  Top 1.27: Q23.2 84.45,33.15 83.57,32.26 80.9,32.26 77.85,29.21 72.39,29.21 70.48,27.3 69.6,27.3 68.94,26.65 J16.2
N$63
  Top 0.305: J18.3 61.94,28.41 65.53,32 69.34,32 76.07,38.73 U$11.IN+
  Bottom 2.54: J18.2 J18.3
N$64  (via drill 0.35)
  Top 0.305: U$12.A2 53.98,40.77 54.56,41.35 57.73,41.35 58.47,40.62 58.47,39.88 60.33,38.02 65.61,38.02 v68.96,34.67
  Bottom 0.305: v68.96,34.67 73.94,29.69 79.3,29.69 79.53,29.46 Q21.1
N$65
  Bottom 1.27: Q21.2 84.45,27.56 83.69,26.8 79.38,26.8 78.11,28.07 73.53,28.07 72.44,26.97 J17.1
N$66
  Top 1.27: Q22.2 84.45,26.16 83.82,26.8 77.26,26.8 J17.2
N$67
  Top 0.305: U$14.D2 U$14.C2 U$14.B2 2.92,59.94 5.59,59.94 8.26,62.61 U$13.OUT+ 9.76,61.48 R14.2 R13.2
N$68
  Bottom 0.305: U$14.A1 2.92,59.94 2.92,52.32 3.17,52.07 6.73,52.07 U$13.OUT-
N$69  (via drill 0.35)
  Top 0.305: R13.1 4.95,56.9 U$14.C1 | Q27.1 20.76,57.22 v20.32,57.66
  Bottom 0.305: v20.32,57.66 18.92,59.05 7.11,59.05 U$14.C1
N$70  (via drill 0.35)
  Top 0.305: R14.1 6.62,58.67 U$14.B1 | Q28.1 21.97,60.72 v21.97,60.45
  Bottom 0.305: U$14.B1 5.84,60.33 21.84,60.33 v21.97,60.45
N$71  (via drill 0.35)
  Top 0.305: Q26.1 15.3,57.85 v15.24,57.91
  Bottom 0.305: U$14.D1 6.73,56.13 10.92,56.13 12.7,57.91 v15.24,57.91
N$72  (via drill 0.35)
  Top 0.305: v15.62,61.21 14.52,62.31 Q25.1
  Bottom 0.305: v15.62,61.21 6.6,61.21 5.26,62.55 2.99,62.55 U$14.A2
N$73
  Top 1.016: Q26.3 13.55,52.96 13.34,52.96 9.78,49.4 8.33,49.4 J20.2
N$74
  Top 1.016: Q25.3 11.66,59.07 11.66,53.43 9.21,50.98 4.99,50.98 2.62,48.6 J20.1
N$75
  Top 0.61: J19.1 9.72,47.19
  Top 1.016: Q28.3 17.14,57.83 17.14,52.58 16,51.44 13.96,51.44 9.72,47.19
N$76
  Top 1.016: Q27.3 19.81,51.6 17.99,49.78 14.73,49.78 13.12,48.17 J19.2
N$77
  Top 2.54: J21.1 J21.2
  Bottom 0.305: J21.2 20.12,49.09 21.78,50.75 21.78,55.16 23.75,57.13 U$13.IN+
N$78
  Top 0.305: U$16.D2 U$16.C2 U$16.B2 29.08,59.94 31.75,59.94 34.42,62.61 U$15.OUT+ 42.15,62.99 43.04,62.1 R16.2 R15.2
N$79
  Bottom 0.305: U$16.A1 29.08,59.94 29.08,52.32 29.34,52.07 32.89,52.07 U$15.OUT-
N$80  (via drill 0.35)
  Top 0.305: U$16.C1 33.4,59.18 40.02,59.18 41.04,58.17 R15.1 41.04,54.34 41.78,53.59 44.32,53.59 44.96,54.23 v44.96,56.01
  Bottom 0.305: 45.98,58.16 Q31.1 44.96,57.17 v44.96,56.01
N$81  (via drill 0.35)
  Top 0.305: U$16.B1 30.61,58.93 31.88,58.93 33.02,60.07 37.85,60.07 | 37.85,60.07 38.99,60.07 40.01,61.09 R16.1 | v37.85,61.72 37.85,60.07
  Bottom 0.305: v37.85,61.72 38.69,62.57 Q32.1
N$82  (via drill 0.35)
  Top 0.305: U$16.D1 34.16,57.4 38.48,57.4 v38.99,57.91
  Bottom 0.305: v38.99,57.91 39.05,57.85 Q30.1
N$83
  Bottom 0.305: Q29.1 33.42,61.21 32.76,61.21 31.42,62.55 29.16,62.55 U$16.A2
N$84
  Bottom 0.61: 39.71,52.96 39.5,52.96
  Bottom 1.016: Q30.3 39.71,52.96 | 39.5,52.96 35.94,49.4 34.49,49.4 J23.2
N$85
  Bottom 1.016: Q29.3 37.18,56.2 37.18,52.79 35.37,50.98 31.15,50.98 28.78,48.6 J23.1
N$86
  Bottom 1.016: Q32.3 43.18,52.45 42.16,51.44 40.25,51.44 36.01,47.19 J22.1
N$87
  Bottom 1.016: Q31.3 46.86,52.49 44.15,49.78 40.89,49.78 39.28,48.17 J22.2
N$88
  Top 0.305: J24.2 46.28,49.09 47.95,50.75 47.95,55.16 49.91,57.13 U$15.IN+
  Top 2.54: J24.1 J24.2
N$89
  Bottom 0.254: R18.2 69.07,61.09
  Bottom 0.305: R18.2 68.94,62.37 68.33,62.99 U$17.OUT+ 60.58,62.48 58.04,59.94 55.24,59.94 U$18.B2 U$18.C2 U$18.D2 53.98,52.32 54.48,51.82 62.23,51.82 64.9,54.48 66.41,54.48 R17.2
N$90
  Top 0.305: U$18.A1 56.64,61.09 57.78,61.09 60.58,58.29 U$17.OUT-
N$91
  Bottom 0.305: U$18.C1 R17.1 64.41,57.42 65.41,58.42 75.31,58.42 77.09,56.64 Q35.1
N$92
  Bottom 0.305: U$18.B1 61.59,58.67 64.14,61.21 R18.1 66.94,59.8 67.18,59.56 73.03,59.56 74.42,60.96 78.74,60.96 79.88,62.1 Q36.1
N$93
  Top 0.305: U$18.D1 56.52,49.78 56.69,49.61 56.69,46.05 57.53,45.21 78.23,45.21 78.74,45.72 Q34.1
N$94
  Top 1.27: Q36.2 84.45,60.07 83.82,59.44 79.12,59.44 76.45,56.77 74.8,56.77 70.36,52.32 67.31,52.32 65.44,50.45 J25.1
N$95
  Top 1.27: Q35.2 84.45,54.86 83.57,53.98 80.9,53.98 77.85,50.93 72.39,50.93 70.48,49.02 69.6,49.02 68.94,48.37 J25.2
N$96
  Top 0.305: J27.3 61.94,50.13 65.53,53.72 69.34,53.72 76.07,60.45 U$17.IN+
  Bottom 2.54: J27.2 J27.3
N$97  (via drill 0.35)
  Top 0.305: U$18.A2 53.98,62.48 54.56,63.07 57.73,63.07 58.47,62.33 58.47,61.59 60.33,59.74 65.61,59.74 v68.96,56.39
  Bottom 0.305: v68.96,56.39 73.94,51.41 79.3,51.41 79.53,51.18 Q33.1
N$98
  Bottom 1.27: Q33.2 84.45,49.28 83.69,48.51 79.38,48.51 78.11,49.78 73.53,49.78 72.44,48.69 J26.1
N$99
  Top 1.27: Q34.2 84.45,47.88 83.82,48.51 77.26,48.51 J26.2
N$100
  Top 0.305: U$20.D2 U$20.C2 U$20.B2 2.92,81.66 5.59,81.66 8.26,84.33 U$19.OUT+ 9.76,83.2 R20.2 R19.2
N$101
  Bottom 0.305: U$20.A1 2.92,81.66 2.92,74.04 3.17,73.79 6.73,73.79 U$19.OUT-
N$102  (via drill 0.35)
  Top 0.305: R19.1 4.95,78.61 U$20.C1 | Q39.1 20.76,78.93 v20.32,79.38
  Bottom 0.305: v20.32,79.38 18.92,80.77 7.11,80.77 U$20.C1
N$103  (via drill 0.35)
  Top 0.305: R20.1 6.62,80.39 U$20.B1 | Q40.1 21.97,82.44 v21.97,82.17
  Bottom 0.305: U$20.B1 5.84,82.04 21.84,82.04 v21.97,82.17
N$104  (via drill 0.35)
  Top 0.305: Q38.1 15.3,79.57 v15.24,79.63
  Bottom 0.305: U$20.D1 6.73,77.85 10.92,77.85 12.7,79.63 v15.24,79.63
N$105  (via drill 0.35)
  Top 0.305: v15.62,82.93 14.52,84.03 Q37.1
  Bottom 0.305: v15.62,82.93 6.6,82.93 5.26,84.27 2.99,84.27 U$20.A2
N$106
  Top 1.016: Q38.3 13.55,74.68 13.34,74.68 9.78,71.12 8.33,71.12 J29.2
N$107
  Top 1.016: Q37.3 11.66,80.79 11.66,75.14 9.21,72.69 4.99,72.69 2.62,70.32 J29.1
N$108
  Top 0.61: J28.1 9.72,68.91
  Top 1.016: Q40.3 17.14,79.55 17.14,74.3 16,73.15 13.96,73.15 9.72,68.91
N$109
  Top 1.016: Q39.3 19.81,73.32 17.99,71.5 14.73,71.5 13.12,69.89 J28.2
N$110
  Top 2.54: J30.1 J30.2
  Bottom 0.305: J30.2 20.12,70.8 21.78,72.47 21.78,76.88 23.75,78.85 U$19.IN+
N$111
  Top 0.305: U$22.D2 U$22.C2 U$22.B2 29.08,81.66 31.75,81.66 34.42,84.33 U$21.OUT+ 42.15,84.71 43.04,83.82 R22.2 R21.2
N$112
  Bottom 0.305: U$22.A1 29.08,81.66 29.08,74.04 29.34,73.79 32.89,73.79 U$21.OUT-
N$113  (via drill 0.35)
  Top 0.305: U$22.C1 33.4,80.9 40.02,80.9 41.04,79.88 R21.1 41.04,76.06 41.78,75.31 44.32,75.31 44.96,75.95 v44.96,77.72
  Bottom 0.305: 45.98,79.88 Q43.1 44.96,78.89 v44.96,77.72
N$114  (via drill 0.35)
  Top 0.305: U$22.B1 30.61,80.64 31.88,80.64 33.02,81.79 37.85,81.79 | 37.85,81.79 38.99,81.79 40.01,82.8 R22.1 | v37.85,83.44 37.85,81.79
  Bottom 0.305: v37.85,83.44 38.69,84.28 Q44.1
N$115  (via drill 0.35)
  Top 0.305: U$22.D1 34.16,79.12 38.48,79.12 v38.99,79.63
  Bottom 0.305: v38.99,79.63 39.05,79.56 Q42.1
N$116
  Bottom 0.305: Q41.1 33.42,82.93 32.76,82.93 31.42,84.27 29.16,84.27 U$22.A2
N$117
  Bottom 0.61: 39.71,74.68 39.5,74.68
  Bottom 1.016: Q42.3 39.71,74.68 | 39.5,74.68 35.94,71.12 34.49,71.12 J32.2
N$118
  Bottom 1.016: Q41.3 37.18,77.92 37.18,74.51 35.37,72.69 31.15,72.69 28.78,70.32 J32.1
N$119
  Bottom 1.016: Q44.3 43.18,74.17 42.16,73.15 40.25,73.15 36.01,68.91 J31.1
N$120
  Bottom 1.016: Q43.3 46.86,74.21 44.15,71.5 40.89,71.5 39.28,69.89 J31.2
N$121
  Top 0.305: J33.2 46.28,70.8 47.95,72.47 47.95,76.88 49.91,78.85 U$21.IN+
  Top 2.54: J33.1 J33.2
N$122
  Bottom 0.254: R24.2 69.07,82.8
  Bottom 0.305: R24.2 68.94,84.09 68.33,84.71 U$23.OUT+ 60.58,84.2 58.04,81.66 55.24,81.66 U$24.B2 U$24.C2 U$24.D2 53.98,74.04 54.48,73.53 62.23,73.53 64.9,76.2 66.41,76.2 R23.2
N$123
  Top 0.305: U$24.A1 56.64,82.8 57.78,82.8 60.58,80.01 U$23.OUT-
N$124
  Bottom 0.305: U$24.C1 R23.1 64.41,79.14 65.41,80.14 75.31,80.14 77.09,78.36 Q47.1
N$125
  Bottom 0.305: U$24.B1 61.59,80.39 64.14,82.93 R24.1 66.94,81.52 67.18,81.28 73.03,81.28 74.42,82.68 78.74,82.68 79.88,83.82 Q48.1
N$126
  Top 0.305: U$24.D1 56.52,71.5 56.69,71.32 56.69,67.77 57.53,66.93 78.23,66.93 78.74,67.44 Q46.1
N$127
  Top 1.27: Q48.2 84.45,81.79 83.82,81.15 79.12,81.15 76.45,78.49 74.8,78.49 70.36,74.04 67.31,74.04 65.44,72.17 J34.1
N$128
  Top 1.27: Q47.2 84.45,76.58 83.57,75.69 80.9,75.69 77.85,72.64 72.39,72.64 70.48,70.74 69.6,70.74 68.94,70.08 J34.2
N$129
  Top 0.305: J36.3 61.94,71.85 65.53,75.44 69.34,75.44 76.07,82.17 U$23.IN+
  Bottom 2.54: J36.2 J36.3
N$130  (via drill 0.35)
  Top 0.305: U$24.A2 53.98,84.2 54.56,84.78 57.73,84.78 58.47,84.05 58.47,83.31 60.33,81.46 65.61,81.46 v68.96,78.11
  Bottom 0.305: v68.96,78.11 73.94,73.13 79.3,73.13 79.53,72.9 Q45.1
N$131
  Bottom 1.27: Q45.2 84.45,70.99 83.69,70.23 79.38,70.23 78.11,71.5 73.53,71.5 72.44,70.41 J35.1
N$132
  Top 1.27: Q46.2 84.45,69.6 83.82,70.23 77.26,70.23 J35.2

## Text on the board
tPlace: + | + | 1 | + | + | IN | IN | IN | 3.3V | OUT | 3.3V | 3.3V | - | - | 2 | - | - | 3 | 4 | + | + | 1 | + | + | IN | IN | IN | 3.3V | 3.3V | OUT | 3.3V | - | - | 2 | - | - | 3 | 4 | + | + | 1 | + | + | IN | IN | IN | 3.3V | - | 3.3V | - | OUT | 3.3V | 2 | - | - | 3 | 4 | + | + | 1 | + | + | IN | 3.3V | IN | IN | 3.3V | - | - | OUT | 3.3V | 2 | - | - | 3 | 4
bPlace: TX | RX | G2 | G0 | VCC | GND | TX | RX | G2 | G0 | VCC | GND | GND | VCC | G2 | G0 | TX | RX | TX | RX | G2 | G0 | VCC | GND | TX | RX | G2 | G0 | VCC | GND | GND | VCC | G2 | G0 | TX | RX | TX | RX | G2 | G0 | VCC | GND | TX | RX | G2 | G0 | VCC | GND | GND | VCC | G2 | G0 | TX | RX | TX | RX | G2 | G0 | VCC | GND | TX | RX | G2 | G0 | VCC | GND | GND | VCC | G2 | G0 | TX | RX